# Altium PCB Accumulator_Voltage_Indicator.PcbDoc
Units mm, origin at the board's own origin, x right, y up, seen from the top; angles counter-clockwise.
Board outline 85.02 x 37.04 mm, 2 copper layers (Top Layer, Bottom Layer); 13 components, 9 nets, 34 pads, 7 vias.
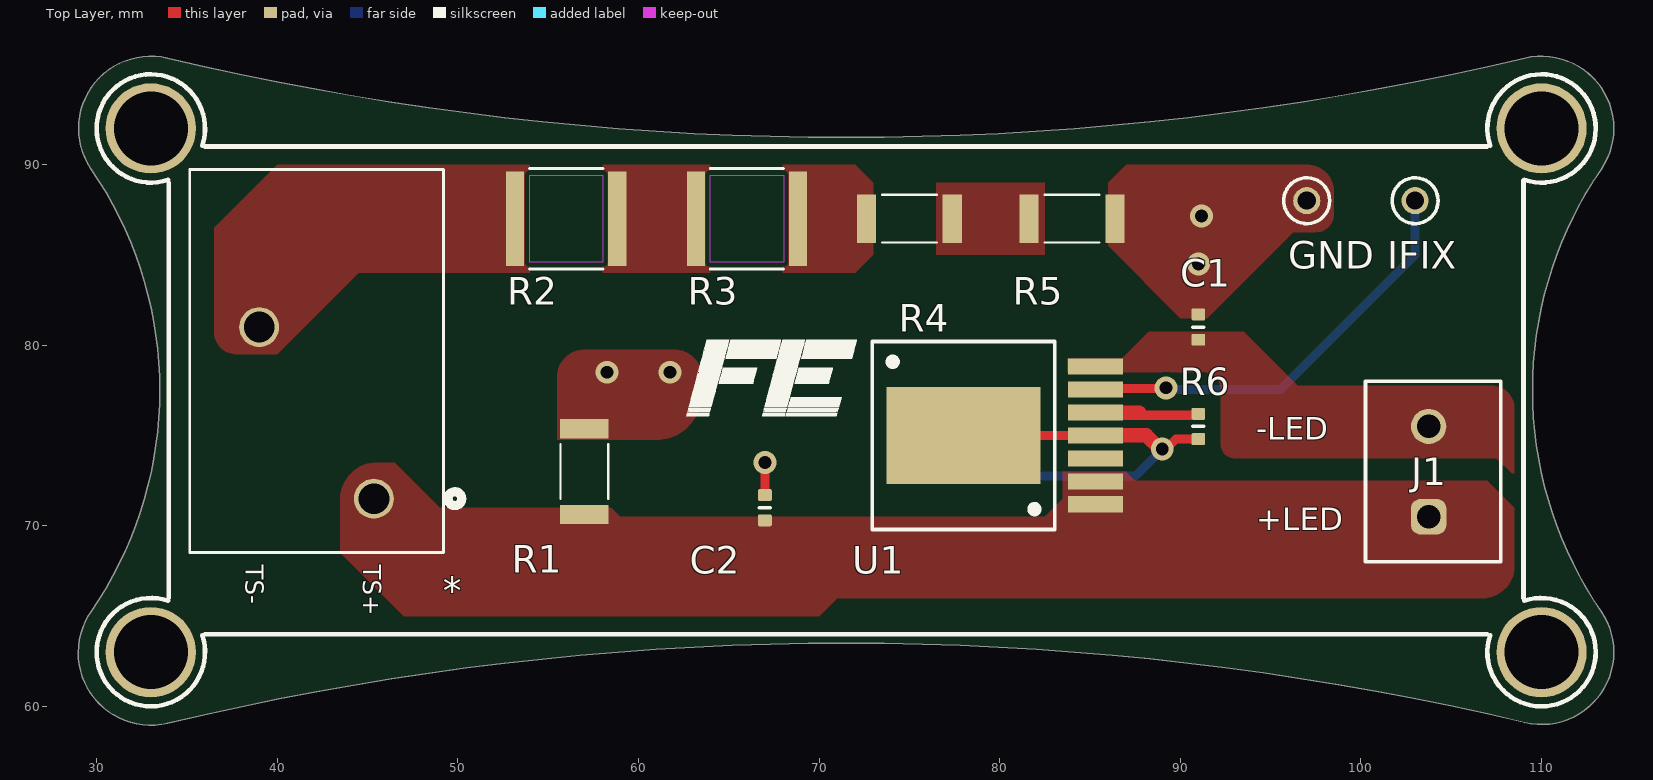
[diagram p0: Top Layer view]
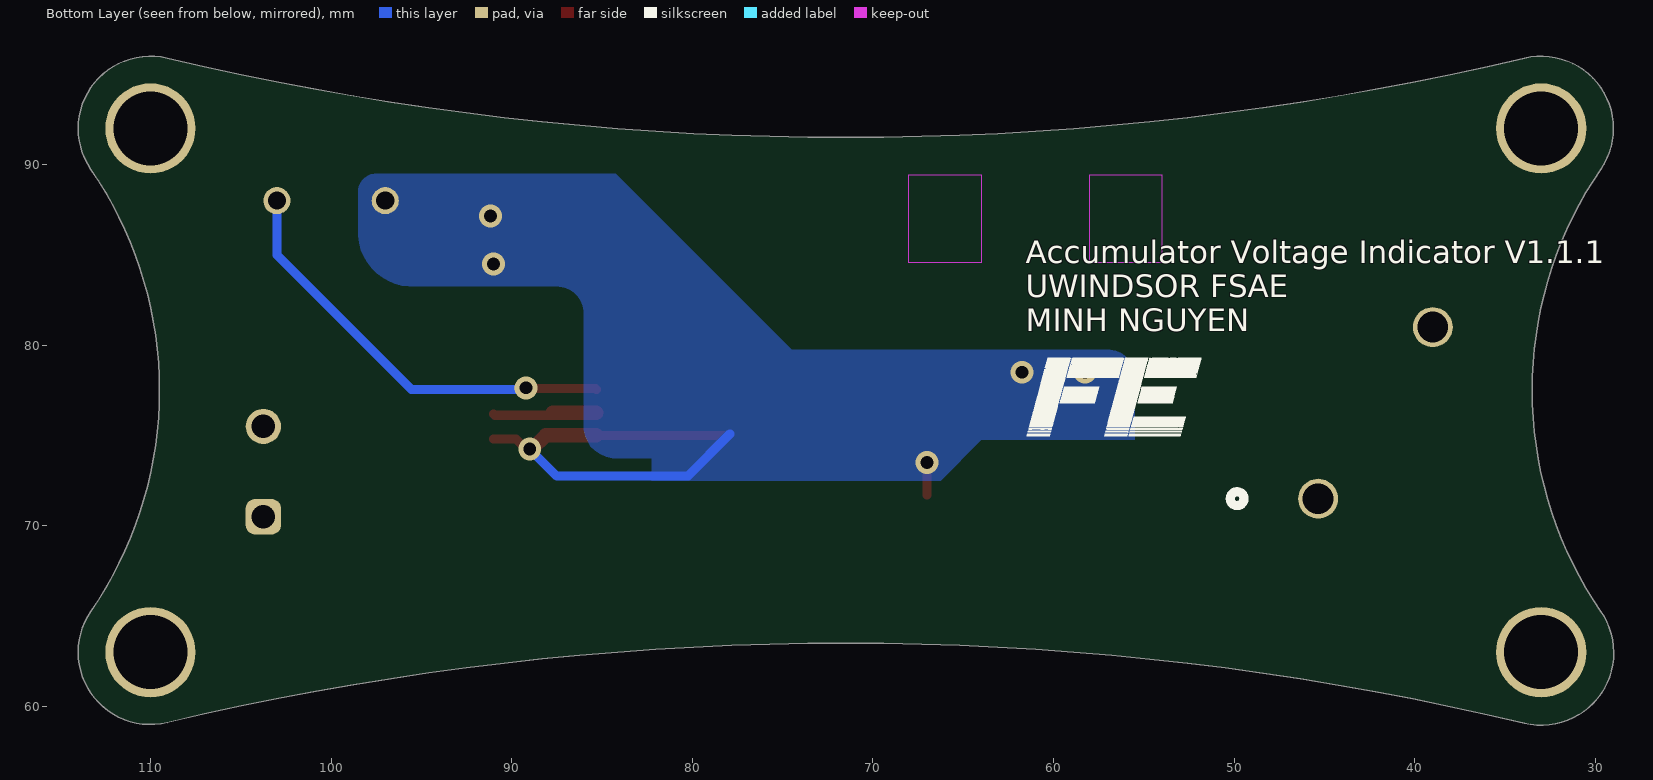
[diagram p1: Bottom Layer view, seen from below]
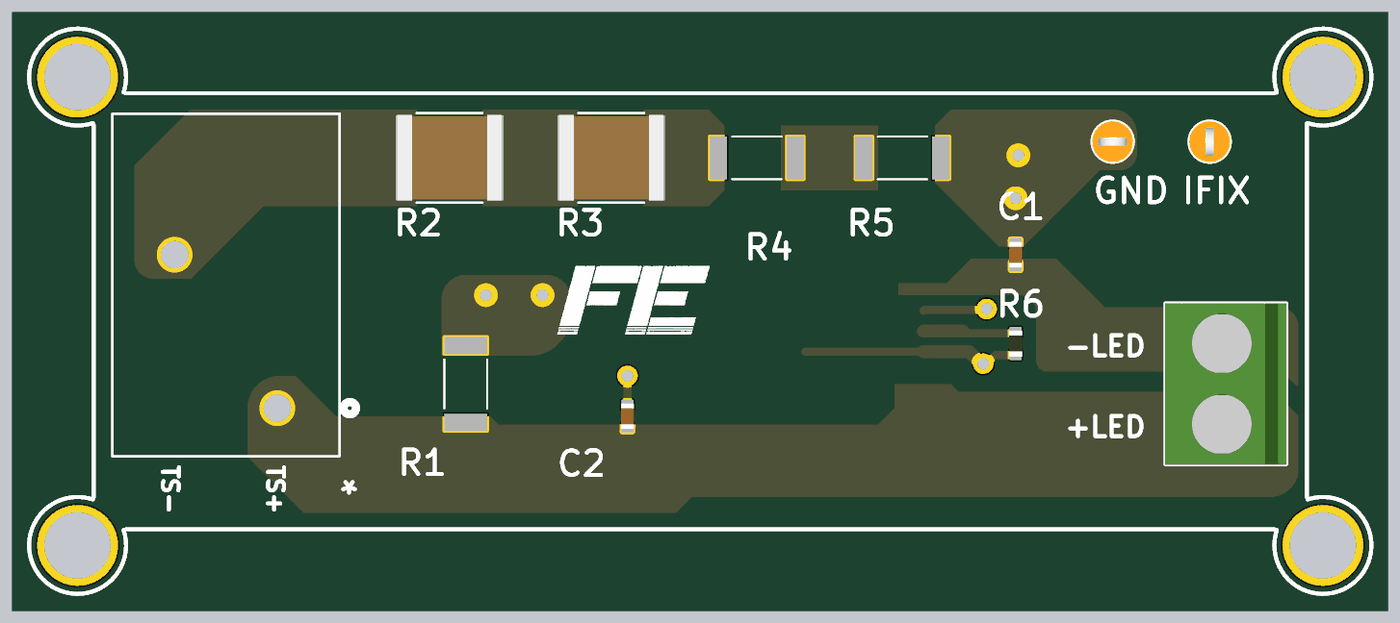
[diagram p2: 3D render of the assembled board from above, using the file's embedded part models]

## Layer stack, top to bottom
Top Solder: solder mask 0.0102, Solder Resist, Dk 3.5
Top Layer: signal copper 0.0356
Dielectric 1: dielectric 0.32, FR-4, Dk 4.8
Bottom Layer: signal copper 0.0356
Bottom Solder: solder mask 0.0102, Solder Resist, Dk 3.5

## Board outline
33.498,77.499 ccw(c11.89,77.503) 29.703,89.735 cw(c33,92) 33.922,95.892 ccw(c71.5,254.447) 71.5,91.5 ccw(c71.5,254.446) 109.078,95.892 cw(c110,92) 113.297,89.735 ccw(c131.111,77.5) 109.5,77.5 ccw(c131.111,77.5) 113.297,65.265 cw(c110,63) 109.078,59.108 ccw(c71.5,-99.445) 71.5,63.5 ccw(c71.5,-97.83) 33.926,59.064 cw(c32.992,62.966) 29.703,65.264 ccw(c11.908,77.49)

## Design rules (kind name [scope] priority, off if disabled: settings)
Clearance [All] p1: gap=0.254 ignorepadtopadclearanceinfootprint=FALSE
HoleSize [All] p1: absolutevalues=TRUE maxlimit=6 minlimit=0.025 maxpercent=80.000 minpercent=20.000
MinimumSolderMaskSliver [All] p1: minsoldermaskwidth=0.117
PlaneConnect [All] p1: planeconnectstyle=Direct reliefexpansion=0.508 reliefentries=4 reliefconductorwidth=0.254 reliefairgap=0.254
PolygonConnect [All] p1: connectstyle=Direct reliefconductorwidth=0.254 reliefentries=4 polygonreliefangle="90 Angle" airgapwidth=0.254
RoutingVias [All] p1: holewidth=0.711 width=1.27 viastyle="Through Hole" minholewidth=0.711 minwidth=1.27 maxholewidth=0.711 maxwidth=1.27
SolderMaskExpansion [All] p1: expansion=0.102 istentingtop=FALSE
Width [All] p1: maxlimit=0.8 minlimit=0.5 preferedwidth=0.6 minimp=50.000000 maximp=50.000000 favimp=50.000000
27 further rules are at their usual default settings.

## Components (designator, comment, footprint, x,y, rotation, side; value= is the part's Value field where it differs from the comment)
* "1017514" CONN_1017514 45.35,71.5 r180 top
C1 "Capacitor 1µF +/-0.1% 25V 0603" CAPC0603(1608)100_L 91,81 r270 top value=1µF
C2 "Capacitor 1µF +/-0.1% 25V 0603" CAPC0603(1608)100_L 67,71 r270 top value=1µF
GND "5003" KSTN-5003 97,88 r0 top
IFIX "5003" KSTN-5003 103,88 r90 top
J1 "691137710002" 691137710002 104,73 r90 top
R1 "RMCF2010FT1M00" RESC5025X65N 57,73 r90 top value=1M
R2 "HVC2512T5004JET" RES_2512_OHM-L 56,87 r0 top value=5M
R3 "HVC2512T5004JET" RES_2512_OHM-L 66,87 r0 top value=5M
R4 "RC2010FK-07619KL" RESC5025X65N 75,87 r0 top value=619k
R5 "RMCF2010FT1M00" RESC5025X65N 84,87 r0 top value=1M
R6 "RC0603JR-0724KL" RESC0603(1608)_L 91,75.5 r90 top value=24k
U1 "172946001" WPME-LDHM_TO263-7EP_L13.77W10.16H4.57 -1192,-1195 r180 top

## Footprints (in the part's own frame and the unit in brackets; to place one, negate y for a bottom-side part, rotate by r counter-clockwise, add the part's x,y. Pads: shape width x height; smd on the part's side, far side on the other; paste and mask are expansions set on the pad)
691137710002 [mm] "Horizontal Cable Entry with Pressure Clamp, pitch 5mm, 02p"
  rrect50% 1.95x1.95 hole 1.3: 1(-2.5,0.25)
  round 1.95 hole 1.3: 2(2.5,0.25)
  silkscreen extent -5,-3.75 5,3.75, body extent -5,-3.75 5,3.75, height 11.6
CAPC0603(1608)100_L [mm] "Chip Capacitor, Body 1.6x0.8mm, Height 1.0mm, IPC High Density"
  rrect25% 0.66x0.76 smd: 1(-0.7,0) 2(0.7,0)
  silkscreen extent 0,-0.3 0,0.3, body extent -0.8,-0.4 0.8,0.4, height 0.95
CONN_1017514 [mil]
  round 87 / inner round 60 / far side round 87 hole 67 paste-99999 mask+0: 1(0,0) 2(250,-374.02)
  silkscreen extent -192,-718 402,117
KSTN-5003 [mm] "Test Point, Through Hole, Dia 2.54mm"
  round 1.5 hole 1: 1(0,0)
  silkscreen extent -1.27,-1.27 1.27,1.27, body extent -1.27,-1.27 1.27,1.27, height 4.57
RES_2512_OHM-L [mm]
  rect 1.002x5.249 smd paste+0 mask+0: 1(-2.826,0) 2(2.826,0)
  Top Layer keep-out region: -2.032,-2.413 -2.032,2.413 2.032,2.413 2.032,-2.413
  Keep-Out Layer region: -2.032,-2.413 -2.032,2.413 2.032,2.413 2.032,-2.413
  silkscreen extent -2.03,-2.78 2.03,2.78, body extent -3.22,-2.65 3.22,2.65, height 0.75
RESC0603(1608)_L [mm] "Chip Resistor, Body 1.6x0.8mm, IPC High Density"
  rrect25% 0.66x0.76 smd: 1(-0.7,0) 2(0.7,0)
  silkscreen extent 0,-0.3 0,0.3, body extent -0.8,-0.4 0.8,0.4, height 0.45
RESC5025X65N [mm]
  rect 1.07x2.67 smd: 1(-2.38,0) 2(2.38,0)
  silkscreen extent -1.52,-1.32 1.52,1.32
WPME-LDHM_TO263-7EP_L13.77W10.16H4.57 [mm] "LED Step Down High Current Module, TO236-7EP. body 13.77x10.16mm"
  rect 3.06x0.89 smd: 1(-1277.305,-1266.19) 2(-1277.305,-1267.46) 3(-1277.305,-1268.73) 4(-1277.305,-1270) 5(-1277.305,-1271.27) 6(-1277.305,-1272.54) 7(-1277.305,-1273.81)
  rect 8.54x5.35 smd paste-10: EP(-1270,-1270)
  silkscreen extent -1275.05,-1275.21 -1264.95,-1264.79, body extent -1278.85,-1275.08 -1265.08,-1264.92, height 4.77

## Part data
*: library part CMP-002-00077-5, "Barrier Strip Terminal Block", RoHS Compliant=Yes
C1 C2: library part CMP-001-00055-4, "Chip Capacitor, 1µF +/-0.1%, 25V, 0603, Thickness 1 mm", Case/Package=0603, Max Operating Temperature=85°C, Min Operating Temperature=-55°C, Tolerance=20%, Voltage Rating=25V, Mounting Technology=SMT, Pins=2
GND IFIX: library part CMP-002-00037-2, "Test Point, Orange, Height 4.6 mm, Tail Length 3 mm, 1-Pin THD, RoHS", Colour=Orange, Manufacturer=Keystone, Package Description="1-Pin Through Hole Device, Dia 2.54 mm", Package Quantity=10, Case/Package=5003, Connector Type=TestPoint, Contact Material=Bronze, Contact Plating=Tin, Datasheet URL=http://keyelco.com/userAssets/file/M65p56.pdf, Datasheet Version=Jun-15, Diameter=2.54mm, Manufacturer URL=http://www.keyelco.com/, Mounting Technology=TH, Package Reference=5003, Packaging=Bulk, Pins=1, RoHS Compliant=True
J1: library part CMP-002-00084-1, "Series 1377 - 5.00 mm Horizontal Entry with Pressure Clamp WR-TBL, 2 pin", RoHS Compliant=Yes
R1 R5: library part CMP-009-00212-1, "Fixed Resistor, Metal Glaze/thick Film, 0.75W, 1000000ohm, 200V, 1% +/-Tol, 100ppm/Cel, Surface Mount, 2010", Case/Package=2010, Max Operating Temperature=155°C, Min Operating Temperature=-55°C, Package Height=0.55mm, Package Length=5mm, Package Shape=Rectangular, Package Style=SMTMeter, Package Width=2.5mm, Power=750mW, Rated Temperature=70°C, Resistor Type="FIXED RESISTOR", Temperature Coefficient=100ppm/°C, Tolerance=1%, Working Voltage=200V, Construction=Rectangular, JESD-609 Code=e3, Mounting Technology="Surface Mount", Packaging="Tape and Reel", Pins=2, Reach SVHC Compliant=Yes, Reference Standard=AEC-Q200, RoHS Compliant=Yes, Technology="METAL GLAZE/THICK FILM", Terminal Finish=Nickel, Termination=Wraparound
R2 R3: library part CMP-009-00213-4, "Fixed Resistor, Metal Glaze/thick Film, 1W, 5000000ohm, 2000V, 5% +/-Tol, 100ppm/Cel, Surface Mount, 2512", Case/Package=2512, Max Operating Temperature=155°C, Min Operating Temperature=-55°C, Package Height=0.6mm, Package Length=6.3mm, Package Shape=Rectangular, Package Style=SMTMeter, Package Width=3.5mm, Power=1W, Rated Temperature=70°C, Resistor Type="FIXED RESISTOR", Temperature Coefficient=100ppm/°C, Tolerance=5%, Working Voltage=2kV, Additional Feature=PRECISION, Construction=Chip, JESD-609 Code=e3, Mounting Technology="Surface Mount", Packaging="Tape and Reel", Pins=2, Reach SVHC Compliant=Yes, RoHS Compliant=Yes, Technology="METAL GLAZE/THICK FILM", Terminal Finish=Nickel, Termination=Wraparound
R4: library part CMP-009-00210-2, "RES SMD 619K OHM 1% 3/4W 2010", Case/Package="2010 (5025)", Availability=Unavailable, Component Type=Standard, Design Item ID=RC2010FK-07619KL, MP=RC2010FK-07619KL, Pins=2, Price=None, Source=RC2010FK-07619KL.SchLib
R6: library part CMP-009-00184-4, "Fixed Resistor, Metal Glaze/thick Film, 0.1W, 24000ohm, 75V, 5% +/-Tol, 100ppm/Cel, Surface Mount, 0603", Case/Package=0603, Max Operating Temperature=155°C, Min Operating Temperature=-55°C, Power=100mW, Tolerance=5%, Mounting Technology="Surface Mount", Pins=2, RoHS Compliant=Yes
U1: library part CMP-019-00055-1, "LED Driver, 16-Segment", Max Operating Temperature=85°C, Max Supply Voltage=60V, Min Operating Temperature=-40°C, Min Supply Voltage=4.5V, Nominal Supply Voltage=48V, Package Shape=Rectangular, Package Style="MICROELECTRONIC ASSEMBLYMeter", Temperature Grade=INDUSTRIAL, Channels=1, Data Input Mode=SERIAL, fmax-Min=920kHz, Height - Seated (Max)=4.82mm, Interface IC Type="LED DISPLAY DRIVER", Length=10.16mm, Multiplexed Display Capability=No, Number of Segments=16, Pins=7, Reach SVHC Compliant=Yes, RoHS Compliant=Yes, Surface Mount=Yes, Terminal Form="Gull Wing", Terminal Pitch=1.27mm, Terminal Position=SINGLE, Width=9.85mm

## Free pads (board coordinates)
  round 5 hole 4.1 unplated paste-2539.97: 11(33,63) 11(33,92) 11(110,63) 11(110,92)

## Via types
v1: diameter 1.27, hole 0.711, Top Layer to Bottom Layer, 7 vias

## Nets (pads, with @x,y where several pads share a name; then routed paths per layer and width w, separated by ;. In a path a pad name is that pad's centre, name@x,y a point inside that pad or via, vN(x,y) a via of type N, cw(c..) or ccw(c..) an arc to the next point about the centre after c; other vN are vias at no path point)
GND: C1.1 C2.1 GND.1 R1.2 R5.2 R6.1 U1.4 U1.EP | length 28
  Top Layer w0.5: C2.1 v1(67,73.5) ; U1.EP U1.4 ; v1(89,74.25) 89.208,74.25 89.758,74.8 R6.1
  Top Layer w0.8: U1.4 88.123,75 88.873,74.25 v1(89,74.25)
  Bottom Layer w0.5: 77.918,75.082 80.25,72.75 87.5,72.75 v1(89,74.25)
  other v1: 58.25,78.5 61.75,78.5 91,84.5 91.172,87.157
Net*_2: *.2 R2.1
NetC1_2: C1.2 J1.2 U1.7
NetIFIX_1: IFIX.1 U1.6 | length 23.9
  Top Layer w0.5: U1.6 85.354,77.589 89.16,77.589 v1(89.21,77.639)
  Bottom Layer w0.5: v1(89.21,77.639) 89.309,77.54 95.54,77.54 103,85 IFIX.1
NetR2_2: R2.2 R3.1
NetR3_2: R3.2 R4.1
NetR4_2: R4.2 R5.1
NetR6_2: R6.2 U1.5 | length 5.8
  Top Layer w0.5: 87.73,76.27 87.88,76.12 90.92,76.12 R6.2
  Top Layer w0.8: U1.5 87.73,76.27
VCC: *.1 C2.2 J1.1 R1.1 U1.1 U1.2
pads on no net: U1.3

## Polygon pours and split planes (outlines as drawn)
Net*_2 on Top Layer "NET*_2_L01_P001" (solid, remove dead copper, pour order 1): 36.5,86.5 36.5,80.75 ccw(c37.75,80.75) 37.75,79.5 40,79.5 44.5,84 53.968,84 53.968,90 40,90
GND on Top Layer "GND_L01_P012" (solid, remove dead copper, pour order 12): 55.5,74.75 55.5,78.25 cw(c57,78.25) 57,79.75 62,79.75 cw(c62,78.25) 63.5,78.25 63.5,77.29 cw(c60.96,77.29) 60.96,74.75 56.25,74.75
NetC1_2 on Top Layer "NETC1_2_L01_P008" (solid, remove dead copper, pour order 8): 83.75,79.25 86.75,79.25 88.25,80.75 93.5,80.75 96.5,77.75 105.5,77.75 107.25,77.75 cw(c107.25,76.5) 108.5,76.5 108.5,72.75 107.5,73.75 93,73.75 cw(c93,74.5) 92.25,74.5 92.25,77.5 ccw(c91.25,77.5) 91.25,78.5 83.75,78.5
GND on Top Layer "GND_L01_P006" (solid, remove dead copper, pour order 6): 86,89 87,90 97,90 cw(c97,88.5) 98.5,88.5 98.5,87.25 cw(c97.5,87.25) 97.5,86.25 96.25,86.25 91.5,81.5 90,81.5 86,85.5
VCC on Top Layer "VCC_L01_P005" (solid, remove dead copper, pour order 5): 43.5,71.5 43.5,68.5 47,65 70,65 71,66 106.75,66 ccw(c106.75,67.75) 108.5,67.75 108.5,71 107,72.5 87.5,72.5 87,73 83.5,73 83.5,71.5 82.5,70.5 59,70.5 58.5,71 49,71 46.5,73.5 45.5,73.5 ccw(c45.5,71.5)
NetR4_2 on Top Layer "NETR4_2_L01_P004" (solid, remove dead copper, pour order 4): 76.5,88.995 82.5,88.995 82.5,85 76.5,85
NetR3_2 on Top Layer "NETR3_2_L01_P003" (solid, remove dead copper, pour order 3): 68,90 72,90 73,89 73,85 72,84 68,84 68,84.5
NetR2_2 on Top Layer "NETR2_2_L01_P002" (solid, remove dead copper, pour order 2): 58.032,90 63.968,90 63.968,84 58.032,84
GND on Bottom Layer "GND_L02_P013" (solid, remove dead copper, pour order 13): 74.5,79.75 84.25,89.5 97.5,89.5 cw(c97.5,88.5) 98.5,88.5 98.5,86.25 cw(c95.5,86.25) 95.5,83.25 87.5,83.25 ccw(c87.5,81.75) 86,81.75 86,75.5 cw(c84.25,75.5) 84.25,73.75 82.25,73.75 82.25,72.5 66.25,72.5 64,74.75 55.5,74.75 55.5,75 55.5,75.25 55.5,78.25 cw(c57,78.25) 57,79.75

## Silkscreen, mask and mechanical layers (free items; w line width, h text height)
Top Overlay:
  drawing of 28 lines, arcs and shapes, not listed
  text "-LED" at 94.209,74.754 h1.25
  text "+LED" at 94.209,69.754 h1.25
  text "TS-" at 38.254,67.833 h1 r270
  text "TS+" at 44.754,67.833 h1 r270
Bottom Overlay:
  drawing of 17 lines, arcs and shapes, not listed
  text "Accumulator Voltage Indicator V1.1.1 / UWINDSOR FSAE / MINH NGUYEN" at 61.525,80.775 h1.25